# Altium PCB Conv_buck_R1.PcbDoc (part 2 of 2)
Units mm, origin at the board's own origin, x right, y up, seen from the top; angles counter-clockwise.
Board outline 115 x 110 mm, 2 copper layers (Top Layer, Bottom Layer), stack 1.62 mm thick; 149 components, 73 nets, 415 pads, 186 vias.
Unrouted connection lines stored in the file: 3.
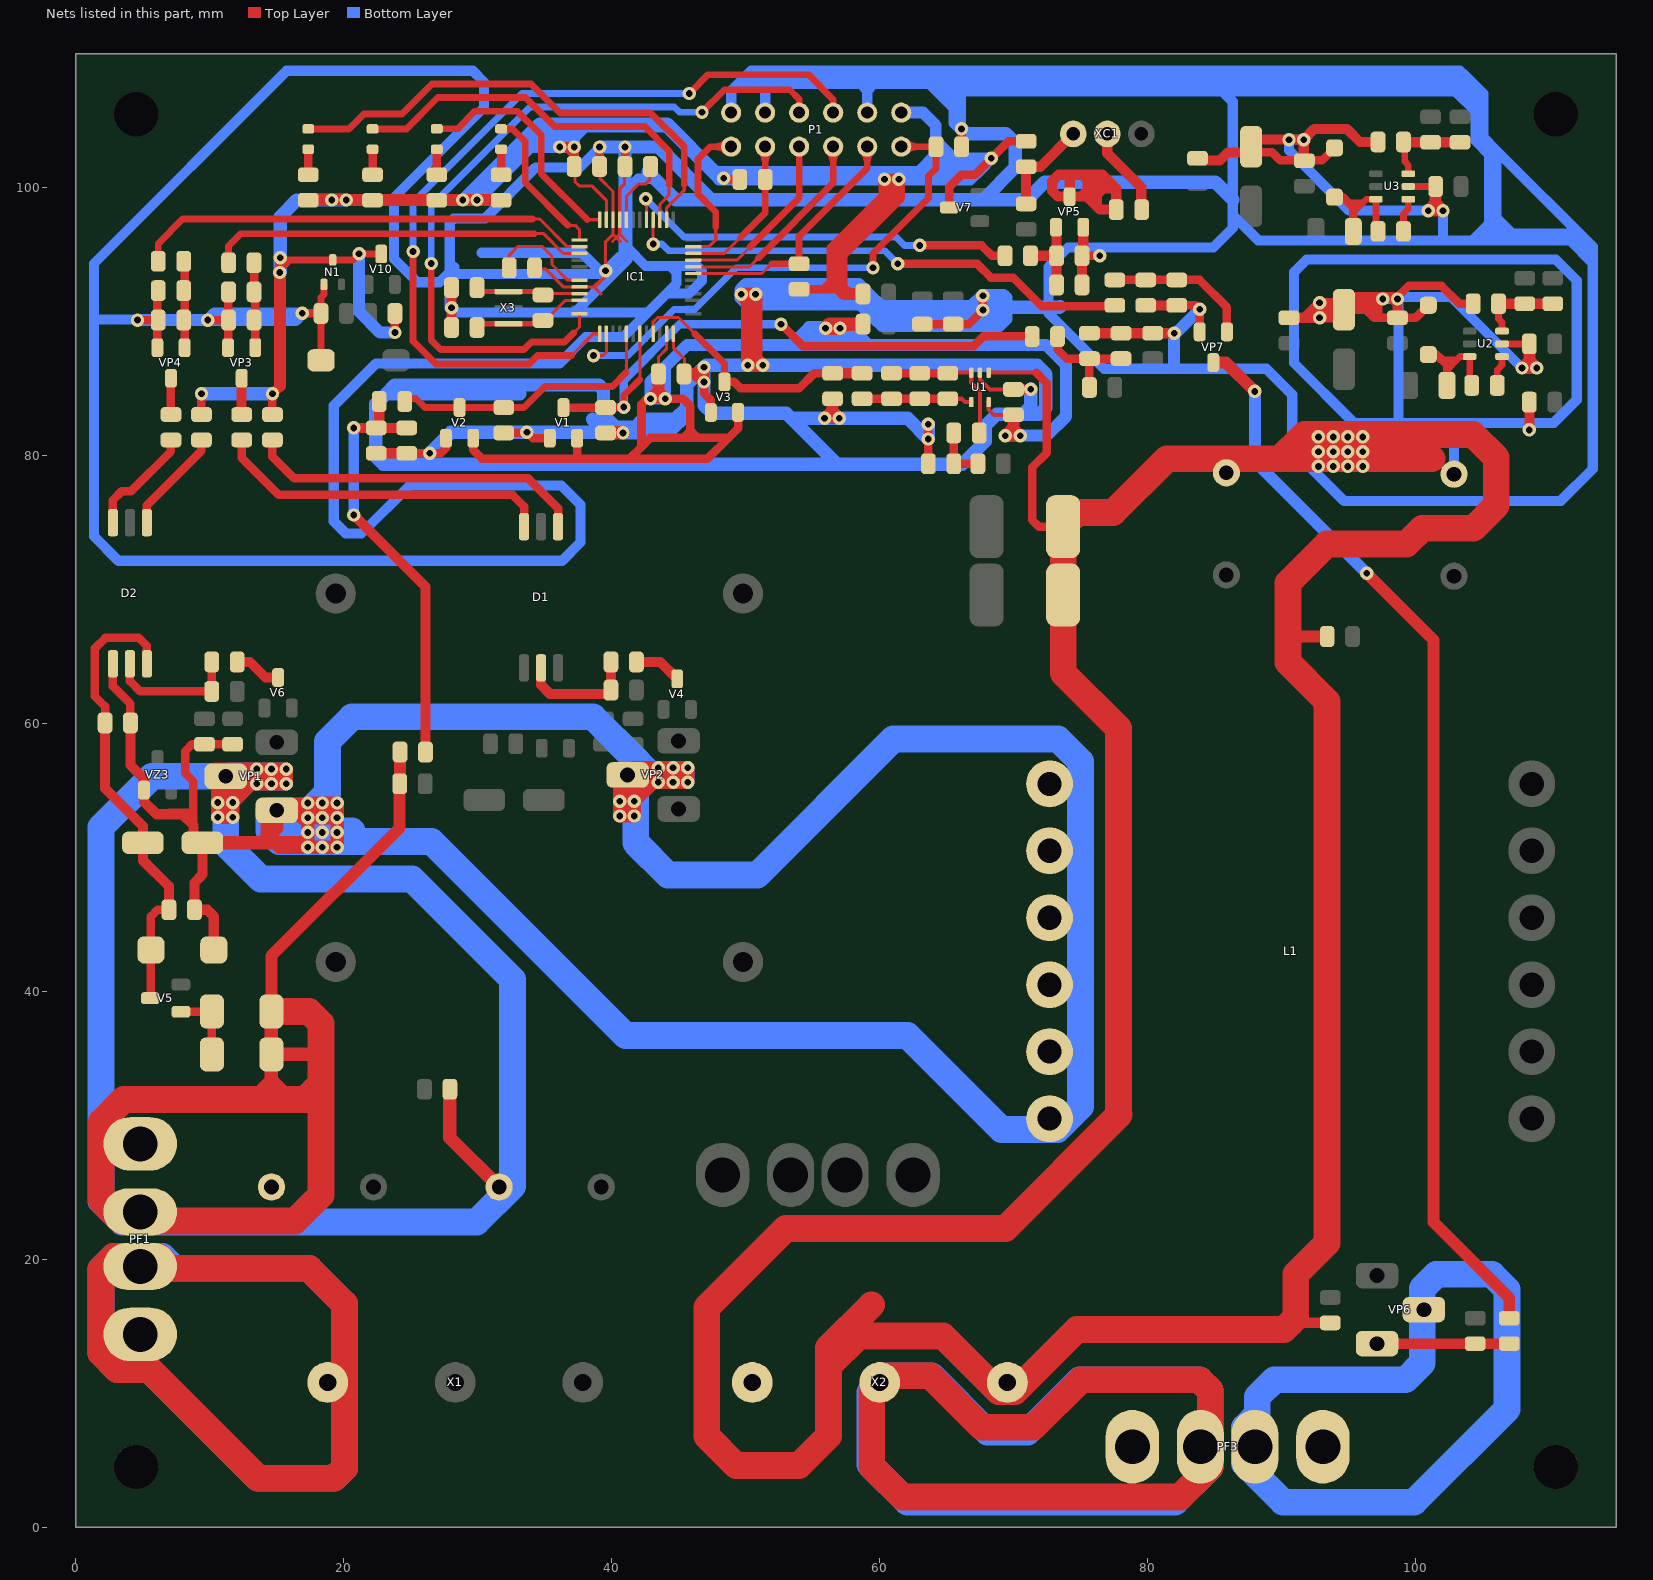
[diagram p2: the nets of this part, all layers, seen from the top]

## Via types
v1: diameter 1, hole 0.5, Top Layer to Bottom Layer, tented both sides, 186 vias

## Nets (pads, with @x,y where several pads share a name; then routed paths per layer and width w, separated by ;. In a path a pad name is that pad's centre, name@x,y a point inside that pad or via, vN(x,y) a via of type N, cw(c..) or ccw(c..) an arc to the next point about the centre after c; other vN are vias at no path point) (continued)
GND: C1.2 C2.2 C3.2 C4.2 C10.1 C11.1 C12.1 C14.1 C21.1 C22.1 C23.1 C25.1 C26.1 C27.2 C29.1 C30.1 C31.2 C33.1 C34.1 C35.1 C36.2 C37.2 C38.2 C39.2 C40.2 C41.2 C43.1 C44.1 C45.2 C46.1 C47.1 IC1.12 IC1.33 IC1.34 IC1.44 N1.GND P1.2 P1.4 P1.10 R1.2 R2.2 R3.2 R15.1 R24.1 R29.1 R33.1 R34.2 R37.2 R48.2 R52.1 R53.1 R56.1 R57.1 S1.1 U1.1 U1.2 U2.2 U3.2 V1.A V2.A V3.A V8.A V9.A VP3.S VP4.S VP5.S VP7.S X2.1 X2.3 | length 1616.4
  Top Layer w0.229: C43.1@33.9,93.925 35.075,93.925 36.396,92.604 IC1.44@37.605,92.604 38.677,92.604 ; C39.2@39.15,101.6 39.15,100.675 40.105,99.72 IC1.34@40.105,97.617 40.105,96.545 ; 39.222,92.059 38.677,92.604 ; 39.222,93.149 38.677,92.604 ; 39.56,96 40.105,96.545 ; 40.06,96 40.355,96.295 ; 40.605,96.505 40.605,96.545 ; 40.65,96 40.355,96.295 ; C38.2@40.95,101.6 40.95,100.275 40.605,99.93 IC1.33@40.605,97.617 40.605,96.545 ; 41.15,96 40.605,96.545 ; IC1.12@44.605,89.104 44.605,88.07 45.45,87.225 C36.2@45.45,86.1 ; 38.677,92.604 38.779,92.604 39.55,93.375 v1(39.55,93.8) 39.55,95.95 40.105,96.505 40.105,96.545 ; 40.105,96.545 40.355,96.295 ; 40.355,96.295 40.605,96.545
  Top Layer w0.305: U1.2@67.5,86.2 67.5,85.7 68.25,84.95 C12.1@69.9,84.95 ; U1.1@68.15,86.2 71.7,86.2
  Top Layer w0.508: S1.1@18.306,87.375 18.3,87.381 C37.2@18.3,90.625 18.3,91.825 18.515,92.04 N1.GND@18.515,92.786 ; U3.2@99.482,100.1 C35.1@101.525,100.1 ; U2.2@106.482,88.35 C34.1@108.525,88.35
  Top Layer w0.635: v1(4.6,90.125) C21.1@6.084,90.125 ; VP4.S@6.084,88.068 C21.1@6.084,90.125 ; R24.1@6.084,92.259 C21.1@6.084,90.125 ; C21.1@6.15,90.125 C21.1@6.084,90.125 ; v1(9.85,90.125) C14.1@11.359,90.125 ; VP3.S@11.359,88.068 C14.1@11.359,90.125 ; C14.1@11.4,90.125 C14.1@11.359,90.125 ; R15.1@11.425,92.525 11.359,92.459 C14.1@11.359,90.125 ; v1(16.9,90.625) C37.2@18.3,90.625 ; R56.1@24.7,80.175 v1(26.425,80.175) 27.225,80.175 27.634,80.584 V2.A@27.634,81.307 ; C47.1@31.95,81.7 33.725,81.7 34.118,81.307 V1.A@35.384,81.307 ; C39.2@39.1,101.6 v1(39.1,103.05) ; C38.2@41,101.6 v1(41,103.05) ; v1(46.9,85.5) 46.9,84.65 47.409,84.141 V3.A@47.409,83.232 ; C41.2@63.2,89.825 C40.2@65.5,89.825 66.675,89.825 v1(67.725,90.875) v1@67.725,91.8 ; C11.1@63.65,79.4 v1(63.65,81.25) v1(63.65,82.35) ; R48.2@66.125,103.075 v1(66.125,104.4) ; 71.7,86.2 72.5,85.4 72.5,80.225 71.4,79.125 71.4,75.2 71.9,74.7 R2.2@73.715,74.7 ; R29.1@75.125,94.925 v1(76.45,94.925) ; R33.1@82.2,91.225 83.625,91.225 v1(83.909,90.941) VP7.S@83.909,89.243 ; C31.2@87.675,102.645 89.33,102.645 89.925,102.05 91.675,102.05 93.042,102.05 V9.A@93.975,102.983 ; C27.2@94.675,90.895 96.33,90.895 96.925,90.3 ; C27.2@95.03,91.25 97.225,91.25 ; 96.925,91.075 96.925,90.3 ; R37.2@97.208,102.983 R37.2@97.325,103.1 ; v1@97.7,91.85 97.225,91.375 97.225,91.25 ; v1@98.675,91.85 99.5,92.675 101.975,92.675 103.3,91.35 R34.2@104.325,91.35 R34.2@104.208,91.233 ; V8.A@100.975,91.233 100.042,90.3 C25.1@98.675,90.3 97.5,90.3 ; 96.925,90.3 97.5,90.3 ; 97.225,91.25 97.225,90.575 97.5,90.3
  Top Layer w0.762: R57.1@22.425,80.175 R56.1@24.625,80.175 ; C45.2@28.05,89.85 v1(28.05,91.05) C44.1@28.05,92.25 ; C12.1@70,84.95 v1(71.3,84.95) ; C22.1@75.125,92.75 R29.1@75.125,94.925 75.216,95.016 VP5.S@75.216,97.057 ; R52.1@75.675,89.15 R53.1@78.038,89.15 R1.2@80.4,89.15 v1(82,89.15) ; C23.1@79.875,91.225 R33.1@82.2,91.225 ; C30.1@83.675,102.05 85.425,102.05 86.02,102.645 C31.2@87.675,102.645 ; C31.2@87.675,103.6 v1(90.575,103.6) v1(91.675,103.6) ; C26.1@90.575,90.3 91.75,90.3 ; C29.1@91.675,102.05 v1(91.675,103.6) ; C27.2@94.159,91.411 v1(92.861,91.411) ; C27.2@94.67,90.9 92.861,90.9 ; C27.2@94.675,90.895 94.091,90.311 v1(92.861,90.311) ; C27.2@94.675,91.85 v1@97.575,91.85 ; R37.2@97.225,103.425 95.875,103.425 94.9,104.4 92.475,104.4 v1(91.675,103.6) ; v1@97.7,91.85 98.15,91.85 ; C25.1@98.675,90.3 v1@98.675,91.325 ; C2.2@102.4,78.62 C2.2@102.9,78.62 ; v1(108.525,81.925) C33.1@108.525,84 ; 91.75,90.3 v1(92.861,91.411) ; 91.75,90.3 92.85,90.3 v1(92.861,90.311) ; v1(92.861,90.311) 92.861,90.9 ; 92.861,90.9 v1(92.861,91.411) ; 98.15,91.85 98.675,91.85 v1(98.675,91.7) v1@98.675,91.325 ; 98.15,91.85 v1@98.675,91.325
  Top Layer w0.8: 90.7,15.25 C4.2@93.65,15.25
  Top Layer w0.889: C36.2@45.45,86.1 46.3,86.1 ; C10.1@56.5,84.25 56.5,83.4 ; 90.575,66.5 C3.2@93.425,66.5 ; 101.475,98.8 v1(100.975,98.3) v1(102.075,98.3) 101.575,98.8 ; 101.525,98.9 C35.1@101.525,100.1 ; 108.475,87.05 v1(107.975,86.55) v1(109.075,86.55) 108.575,87.05 ; 108.525,87.15 C34.1@108.525,88.35 ; 46.3,86.1 v1(46.9,85.5) v1(46.9,86.6) 46.4,86.1 46.3,86.1 ; 56.5,83.4 v1(55.9,82.8) v1(57,82.8) 56.5,83.3 56.5,83.4
  Top Layer w1.016: C46.1@39.55,81.7 v1(40.85,81.7) ; v1(49.675,92.05) 50.175,91.55 v1(50.175,86.75) v1(51.275,86.75) 50.75,87.275 v1(50.75,92.05) v1(49.675,92.05)
  Top Layer w2: 59.4,16.6 56.2,13.4 56.2,12.025 ; 101.245,79.775 89.925,79.775 ; 56.2,12.025 58.45,14.275 64.75,14.275 68.9,10.125 70.125,10.125 74.75,14.75 90.2,14.75 90.7,15.25 91.075,15.625 91.075,18.875 91.806,19.606 93.425,21.225 93.425,61.65 90.5,64.575 90.5,70.5 93.4,73.4 99.35,73.4 100.525,74.575 104.35,74.575 106.05,76.275 106.05,79.85 104.325,81.575 91.725,81.575 89.925,79.775 ; 56.2,12.025 56.2,6.8 54,4.6 49.3,4.6 47.1,6.8 47.1,16.4 53,22.3 69.4,22.3 77.9,30.8 77.85,30.85 77.85,59.65 73.715,63.785 R3.2@73.715,69.6 R2.2@73.715,74.7 74.765,75.75 77.45,75.75 81.475,79.775 89.925,79.775
  Bottom Layer w0.635: v1(66.125,104.4) 66.125,107.156 66.175,107.206 ; v1(82,89.15) v1@82.118,89.15
  Bottom Layer w0.762: v1(4.6,90.125) 4.55,90.175 1.35,90.175 ; 28.275,94.075 27.15,92.95 25.504,92.95 23.75,94.704 23.75,99.275 30.475,106 30.475,107.9 29.635,108.74 15.74,108.74 1.35,94.35 1.35,90.175 ; 28.5,93.575 v1@39.35,93.575 ; 30.3,95.15 37.775,95.15 v1@39.35,93.575 ; v1(41,103.05) v1(39.1,103.05) 39.1,102.986 37.639,101.525 34.347,101.525 30.525,97.703 28.203,97.703 27.914,97.414 27.914,90.986 28.211,90.689 37.239,90.689 ; 44.525,99.4 43.25,100.675 43.229,100.675 41.975,100.675 41.161,99.861 41.161,95.536 ; P1.2@48.925,105.615 48.925,107.256 49.425,107.756 ; P1.4@51.465,105.615 51.465,107.256 ; P1.10@59.085,105.615 59.085,107.256 ; 64.075,107.85 103.175,107.85 ; 64.725,107.206 66.175,107.206 85.606,107.206 ; 65.55,105.934 63.729,107.756 59.585,107.756 ; 90.95,88.525 90.95,86.925 95.425,82.45 102.05,82.45 ; 90.95,88.7 90.95,93.7 91.9,94.65 110.5,94.65 112.064,93.086 112.064,84.164 110.35,82.45 103.75,82.45 ; v1(91.675,103.6) v1(90.575,103.6) 90.575,102.8 95.075,98.3 v1(100.975,98.3) v1(102.075,98.3) 102.075,96.075 ; v1(97.575,91.7) v1(98.675,91.7) v1@98.764,91.611 ; v1@98.675,91.85 102.675,91.85 v1(107.975,86.55) v1(109.075,86.55) ; 98.764,82.911 v1@98.764,91.611 ; v1@98.764,91.761 v1@98.764,91.611 ; C2.2@102.9,78.62 102.9,81.6 ; 1.35,90.175 1.35,73.975 3.175,72.15 36.3,72.15 37.675,73.525 37.675,76.35 36.25,77.775 24.914,77.775 21.325,74.186 20.175,74.186 20.161,74.2 20.15,74.2 19.25,75.1 19.25,83.725 22.4,86.875 36.086,86.875 38.075,88.864 40.864,88.864 42.689,90.689 ; 37.239,90.689 40.125,93.575 ; 37.239,90.689 42.689,90.689 ; v1@39.35,93.575 40.125,93.575 ; 40.125,93.575 41.161,94.611 41.161,95.536 ; 41.161,95.536 42.531,94.166 44.384,94.166 ; 42.689,90.689 44.113,92.113 ; 44.113,92.113 45.796,92.113 46.75,93.066 46.75,93.8 46.384,94.166 44.384,94.166 ; 44.113,92.113 44.85,92.85 44.85,93.7 44.384,94.166 ; 49.425,107.756 50.965,107.756 ; 49.425,107.756 50.07,108.4 ; 50.07,108.4 50.425,108.756 103.345,108.756 103.7,108.4 ; 50.07,108.4 102.625,108.4 ; 50.965,107.756 51.465,107.256 ; 50.965,107.756 51.965,107.756 ; 51.465,107.256 51.965,107.756 ; 51.965,107.756 58.585,107.756 ; 58.585,107.756 59.085,107.256 ; 58.585,107.756 59.585,107.756 ; 59.085,107.256 59.585,107.756 ; 85.606,107.206 102.995,107.206 104.5,105.7 104.5,103.5 105.525,102.475 105.525,97.325 ; 85.606,107.206 86.375,106.436 86.375,99.125 86.375,97.975 ; 86.375,97.975 88.275,96.075 102.075,96.075 ; 86.375,97.975 86.375,97 84.925,95.55 74.075,95.55 72.625,94.1 72.625,91.075 72.625,90.625 76.76,86.49 88.885,86.49 90.825,84.55 90.825,80.475 94.675,76.625 110.875,76.625 113.256,79.006 113.256,94.375 ; 102.05,82.45 102.9,81.6 ; 102.05,82.45 103.75,82.45 ; 102.075,96.075 104.275,96.075 ; 102.625,108.4 103.7,108.4 ; 102.625,108.4 103.175,107.85 ; 102.9,81.6 103.75,82.45 ; 103.175,107.85 105.075,105.95 ; 103.7,108.4 105.075,107.025 105.075,105.95 ; 104.275,96.075 105.525,97.325 ; 104.275,96.075 105.015,96.075 ; 105.015,96.075 105.64,96.7 ; 105.015,96.075 105.515,96.075 ; 105.075,105.95 105.075,103.775 106.075,102.775 ; 105.515,96.075 105.64,96.2 105.64,96.7 ; 105.515,96.075 111.556,96.075 113.256,94.375 ; 105.525,97.325 105.64,97.21 ; 105.64,96.7 105.64,97.21 ; 105.64,97.21 106.256,96.595 ; 106.075,102.775 106.075,97.781 106.256,97.6 ; 106.075,102.775 113.256,95.595 113.256,95.145 ; 106.256,96.595 106.256,97.6 ; 106.256,96.595 107.261,96.595 ; 106.256,97.6 107.261,96.595 ; 107.261,96.595 111.806,96.595 113.256,95.145 ; 113.256,94.375 113.256,95.145 ; v1(39.55,93.8) 39.975,93.8 41,94.825 40.575,94.825 v1(39.55,93.8)
  Bottom Layer w0.889: v1(4.6,90.125) v1(9.85,90.125) ; 82,86.85 v1(82,89.15) ; v1@82.118,89.15 v1(83.909,90.941) ; v1(9.85,90.125) 10.35,90.625 v1(16.9,90.625) 16.4,90.125 v1(9.85,90.125)
  Bottom Layer w1: 33.138,84.637 23.162,84.637 ; 38.575,82.725 38.925,82.375 40.028,82.375 ; v1@39.203,103.05 v1(41,103.05) ; 41,94.825 v1(41,103.05) ; 42.714,101.19 43.229,100.675 44.78,99.125 47.451,99.125 ; 45.6,83.075 45.6,83.575 44.767,82.742 ; 45.6,83.717 45.6,85.3 v1(46.9,86.6) ; v1(63.65,82.35) v1(63.65,81.25) 62.1,82.8 v1(57,82.8) v1(55.9,82.8) 53.425,82.8 ; 65.65,106.9 65.65,105.282 65.653,105.279 65.653,104.873 v1(66.125,104.4) 66.475,104.05 69.45,104.05 70.15,103.35 70.15,101.525 67.75,99.125 ; v1(71.3,84.95) 71.3,83.7 70.7,83.1 ; 86.375,99.125 85.086,100.414 72.325,100.414 71.036,99.125 67.75,99.125 ; 23.162,84.637 23.8,85.275 39.025,85.275 39.397,84.903 39.397,83.006 40.028,82.375 ; 23.162,84.637 22.4,83.875 22.4,79.925 22.95,79.375 56.85,79.375 ; 40.028,82.375 40.281,82.122 ; 40.281,82.122 41.75,82.122 ; 40.281,82.122 40.653,81.75 40.703,81.7 v1(40.85,81.7) 44.225,81.7 44.647,82.122 ; v1(41,103.05) 43.525,103.05 47.451,99.125 ; 41.75,82.122 42.37,82.742 44.767,82.742 ; 41.75,82.122 44.647,82.122 ; 44.647,82.122 45.267,82.742 44.767,82.742 ; v1(46.9,86.6) v1(46.9,85.5) 46.9,83.775 47.5,83.175 53.05,83.175 53.425,82.8 ; v1(46.9,86.6) 47.05,86.75 v1(50.175,86.75) v1(51.275,86.75) 71.775,86.75 72.423,86.103 72.423,83.575 71.948,83.1 70.7,83.1 ; 47.451,99.125 67.75,99.125 ; 53.425,82.8 56.85,79.375 ; 56.85,79.375 66.175,79.375 67.892,81.092 67.892,82.242 68.75,83.1 70.7,83.1
  Bottom Layer w1.016: v1(26.425,80.175) 28,81.75 v1(33.675,81.75) 40.653,81.75 40.8,81.75 v1(40.85,81.7) ; 50.043,92.768 49.675,92.4 49.675,91.8 50.134,91.341 54.284,91.341 ; v1@67.65,91.134 66.909,91.134 ; 69.125,90.875 v1(67.725,90.875) ; 73.475,91.125 73.425,91.075 72.625,91.075 69.425,91.075 ; 53.575,92.05 54.284,91.341 ; 53.575,92.05 v1(50.75,92.05) v1(49.675,92.05) 49.675,92.368 50.075,92.768 58.433,92.768 59.15,92.05 ; 53.575,92.05 59.15,92.05 ; 54.284,91.341 58.593,91.341 58.8,91.134 ; 58.8,91.134 60.066,91.134 ; 58.8,91.134 59.742,90.192 ; 59.15,92.05 60.066,91.134 ; 59.742,90.192 67.042,90.192 ; 59.742,90.192 60.199,89.736 66.586,89.736 ; 60.066,91.134 66.909,91.134 ; 66.586,89.736 67.042,90.192 ; 66.586,89.736 68.936,89.736 69.425,90.225 ; 66.909,91.134 v1(67.725,91.95) ; 67.042,90.192 67.075,90.225 ; 67.075,90.225 69.425,90.225 ; 67.075,90.225 v1(67.725,90.875) ; v1(67.725,90.875) v1(67.725,91.95) ; v1(67.725,91.95) 69.25,91.95 69.425,91.775 ; v1(67.725,91.95) 67.9,91.775 69.425,91.775 ; 69.425,90.225 69.425,91.075 ; 69.425,91.075 69.425,91.775
  other v1: 92.775,79.2 93.875,79.2 94.975,79.2 96.075,79.2 92.775,80.3 93.875,80.3 94.975,80.3 96.075,80.3 92.775,81.4 93.875,81.4 94.975,81.4 96.075,81.4
GPIO34: IC1.19 P1.9 R46.1 | length 20.9
  Top Layer w0.229: IC1.19@46.105,93.604 51.229,93.604 51.963,94.338
  Top Layer w0.508: 51.963,94.338 53.988,94.338 R46.1@54,94.325 54,96.375 59.085,101.46 P1.9@59.085,103.075 ; P1.9@58.734,102.724 cw(c57.888,101.878) 59.085,101.878 cw(c60.282,101.878) P1.9@59.436,102.724
HOT_SPOT: C17.2 C18.2 C19.1 C20.1 D2.4 L1.1 R22.1 VP1.S VP2.D VZ2.A VZ3.A | length 313.1
  Top Layer w0.635: D2.4@2.76,64.459 2.76,62.79 4.075,61.475 C19.1@4.075,60.05 ; 6.975,53.325 8.577,53.325 8.777,53.525 ; 8.777,52.398 8.777,53.525 ; R22.1@11.7,58.45 C20.1@9.6,58.45 8.675,58.45 8.175,57.95 8.175,56.275 8.777,55.673 8.777,53.525
  Top Layer w0.762: C19.1@4.075,60.05 4.075,56.9 5.084,55.891 VZ3.A@5.084,55.032 5.084,54.166 6.025,53.225 7.95,53.225 8.777,52.398 8.777,51.768 C17.2@9.445,51.1 9.445,48.72 8.85,48.125 C18.2@8.85,46.1 9.8,46.1 10.299,45.601 VZ2.A@10.299,43.1
  Top Layer w1: VP1.S@15,53.52 15.43,53.95 17.18,53.95 v1(17.3,54.07) ; v1@16.9,52.97 v1(17.3,52.97) ; v1(17.3,50.77) v1(17.3,51.87) v1(17.3,52.97) ; VP2.D@40.6,55.57 v1(40.6,54.2) v1(40.6,53.1) v1(41.7,53.1) ; VP2.D@41.7,55.65 v1(41.7,54.2) ; VP2.D@41.74,55.61 v1(43.49,55.61) ; VP2.D@41.74,56.71 v1(43.49,56.71) ; v1@43.1,55.6 v1(41.7,54.2) ; v1(17.3,52.97) v1(18.4,52.97) v1(19.5,52.97) 19.5,53.52 ; v1(17.3,52.97) 17.3,53.52 ; v1(17.3,52.97) 17.85,53.52 ; 17.3,53.52 v1(17.3,54.07) ; 17.3,53.52 17.85,53.52 ; v1(17.3,54.07) v1(18.4,54.07) ; 17.85,53.52 v1(18.4,54.07) ; 17.85,53.52 19.5,53.52 ; v1(18.4,54.07) v1(19.5,54.07) 19.5,53.52 ; v1(41.7,53.1) v1(41.7,54.2) ; v1(41.7,53.1) 41.19,53.61 VP2.D@41.19,56.16 43.49,56.16 ; v1(43.49,55.61) v1(44.59,55.61) v1(45.69,55.61) 45.69,56.16 ; v1(43.49,55.61) 43.49,56.16 ; v1(43.49,55.61) 44.04,56.16 ; 43.49,56.16 v1(43.49,56.71) ; 43.49,56.16 44.04,56.16 ; v1(43.49,56.71) v1(44.59,56.71) ; 44.04,56.16 45.69,56.16 ; 44.04,56.16 v1(44.59,56.71) ; v1(44.59,56.71) v1(45.69,56.71) 45.69,56.16
  Top Layer w1.016: C17.2@9.445,51.1 13.9,51.1 ; v1@16.97,51.1 14.9,51.1 ; v1(19.5,52.97) v1(19.5,51.87) v1(19.5,50.77) v1(18.4,50.77) v1(17.3,50.77) 15.23,50.77 14.9,51.1 ; 13.9,51.1 14.4,51.6 ; 13.9,51.1 14.9,51.1 ; 14.4,51.6 15,52.2 VP1.S@15,53.52 14.3,52.82 14.3,51.7 14.4,51.6 ; 14.4,51.6 14.9,51.1
  Bottom Layer w1: v1@16.9,52.97 v1(17.3,52.97) 17.825,52.97 v1(18.4,52.97) ; v1(17.3,54.07) 17.995,54.07 v1(18.4,54.07) v1(19.5,54.07) ; VP2.D@41.19,56.16 41.8,56.16 42.94,56.16 45.14,56.16 ; VP2.D@41.74,55.61 41.8,55.61 v1@43.01,55.61 ; VP2.D@41.74,56.71 41.8,56.71 42.39,56.71 v1(43.49,56.71) v1(44.59,56.71) v1(45.69,56.71) ; v1@41.8,54.4 v1@43.01,55.61 ; v1(18.4,52.97) v1(19.5,52.97) 19.5,53.52 ; v1(18.4,52.97) 18.95,53.52 ; 18.95,53.52 v1(19.5,54.07) ; 18.95,53.52 19.5,53.52 ; 19.5,53.52 v1(19.5,54.07) ; v1@43.01,55.61 v1(43.49,55.61) v1(44.59,55.61) ; v1(44.59,55.61) 45.14,56.16 ; v1(44.59,55.61) v1(45.69,55.61) 45.69,56.16 ; 45.14,56.16 v1(45.69,56.71) ; 45.14,56.16 45.69,56.16 ; 45.69,56.16 v1(45.69,56.71)
  Bottom Layer w1.9: VP1.S@15,53.52 17.445,53.52 17.825,53.52 18.95,53.52
  Bottom Layer w2: VP1.S@15,53.492 14.4,53.492 14.4,51.975 ; 17.445,53.52 17.995,54.07 18.775,54.85 ; 17.825,52.97 17.825,53.52 ; 18.775,54.749 18.775,54.85 ; 20.625,51.975 14.4,51.975 ; VP2.D@41.17,56.14 VP2.D@41.19,56.16 ; 42.94,56.16 42.39,56.71 41.8,57.3 ; 14.4,51.975 15.175,51.2 26.55,51.2 41.05,36.7 62.1,36.7 69.1,29.7 73.3,29.7 75,31.4 75,57.175 73.325,58.85 61.03,58.85 50.88,48.7 44.2,48.7 41.8,51.1 41.8,54.4 41.8,55.61 41.8,56.16 41.8,56.71 41.8,57.3 ; 18.775,54.85 18.775,58.65 20.625,60.5 38.6,60.5 41.8,57.3
  other v1: 18.4,51.87
IN-: C9.1 R4.1 R5.1 R7.2 U1.3 | length 10.2
  Top Layer w0.305: C9.1@65.15,86.2 U1.3@66.85,86.2 66.85,85.45 67.5,84.8 R7.2@67.5,81.75
  Top Layer w0.635: R5.1@61.3,86.15 C9.1@65.1,86.15
IO: C10.2 IC1.9 R8.2 V3.AK | length 20.1
  Top Layer w0.229: IC1.9@43.105,89.104 43.105,90.005 43.425,90.325 45,90.325 46.225,89.1
  Top Layer w0.508: 46.225,89.1 48.425,86.9 V3.AK@48.425,85.518
  Top Layer w0.635: V3.AK@48.425,85.518 49.132,85.518 49.6,85.05 54.025,85.05 55.125,86.15 C10.2@56.5,86.15
  Top Layer w0.762: C10.2@56.5,86.15 R8.2@58.7,86.15
LED_BAT: H3.K IC1.26 | length 37.4
  Top Layer w0.229: IC1.26@44.105,97.617 44.105,98.505 45.425,99.825 45.425,100.225
  Top Layer w0.508: H3.K@17.35,104.4 20.376,104.4 21.494,105.518 24.356,105.518 26.595,107.757 33.993,107.757 36.159,105.591 42.909,105.591 45.425,103.075 45.425,100.225
LED_FAULT: H1.K IC1.37 | length 11.5
  Top Layer w0.229: 36.75,97.2 37.275,97.2 37.605,96.87 IC1.37@37.605,96.104
  Top Layer w0.508: H1.K@31.749,104.4 32.6,104.4 33.55,103.45 33.55,100.4 36.75,97.2
LED_OUT: H4.K IC1.36 | length 17.7
  Top Layer w0.229: 38.184,97.617 IC1.36@39.105,97.617
  Top Layer w0.508: H4.K@26.95,104.408 28.483,104.408 29.8,105.725 32.95,105.725 34.75,103.925 34.75,101.05 38.184,97.617
LED_PV: H2.K IC1.27 | length 30.2
  Top Layer w0.229: IC1.27@43.605,97.617 43.605,98.78 44.3,99.475 44.3,100.225
  Top Layer w0.508: H2.K@22.15,104.4 24.675,104.4 27.016,106.741 33.572,106.741 35.738,104.575 42.488,104.575 44.3,102.763 44.3,100.225
NetC11_2: C11.2 R6.2 R7.1 | length 4.1
  Top Layer w0.635: R7.1@65.55,81.7 C11.2@65.55,79.4 R6.2@67.35,79.4
NetC14_2: C14.2 R14.2 R15.2 VP3.G | length 6.6
  Top Layer w0.635: R15.2@13.325,92.525 R14.2@13.325,94.725 ; VP3.G@13.391,88.068 R15.2@13.391,92.459
NetC21_2: C21.2 R23.2 R24.2 VP4.G | length 6.5
  Top Layer w0.635: R23.2@8.05,94.525 8.116,94.459 VP4.G@8.116,88.068
NetC22_2: C22.2 R28.2 R29.2 VP5.G | length 6.1
  Top Layer w0.762: R28.2@71.275,94.925 R29.2@73.225,94.925 ; C22.2@73.225,92.75 R29.2@73.225,94.925 ; VP5.G@73.225,96.941 R29.2@73.225,94.925
NetC23_2: C23.2 R32.2 R33.2 VP7.G | length 10.5
  Top Layer w0.635: R32.2@77.575,93.125 R33.2@82.2,93.125 ; R33.2@82.775,93.125 83.9,93.125 85.941,91.084 VP7.G@85.941,89.243
NetC24_1: C24.1 U2.1 | length 2.3
  Top Layer w0.508: C24.1@106.125,85.25 106.125,86.4 106.482,86.756 U2.1@106.482,87.397
NetC24_2: C24.2 L2.1 U2.6 V8.K | length 9.1
  Top Layer w0.508: 101.988,87.162 102.014,87.136 103.089,87.136 ; 102.403,86.45 103.089,87.136 ; C24.2@104.225,85.25 104.069,85.407 U2.6@104.069,87.397 103.35,87.397 103.089,87.136
  Top Layer w0.635: V8.K@100.975,87.55 101.6,87.55 101.988,87.162 ; 102.014,87.136 102.375,86.775 L2.1@102.375,85.525 ; L2.1@102.375,85.25 L2.1@102.375,86.025
NetC28_1: C28.1 U3.1 | length 2.5
  Top Layer w0.508: C28.1@99.125,96.75 99.125,98.05 99.482,98.407 U3.1@99.482,99.148
NetC28_2: C28.2 L3.1 U3.6 V9.K | length 9.1
  Top Layer w0.508: 94.988,98.913 95.014,98.886 96.089,98.886 ; 95.403,98.2 96.089,98.886 ; C28.2@97.225,97 97.069,97.157 U3.6@97.069,99.148 96.35,99.148 96.089,98.886
  Top Layer w0.635: V9.K@93.975,99.3 94.6,99.3 94.988,98.913 ; 95.014,98.886 95.375,98.525 L3.1@95.375,97.275 ; L3.1@95.375,97 95.375,97.775
NetC44_2: C44.2 IC1.45 R49.1 X3.1 | length 7.7
  Top Layer w0.229: R49.1@34.7,92.25 R49.1@34.9,92.05 ; R49.1@34.954,92.104 IC1.45@37.605,92.104
  Top Layer w0.381: C44.2@29.95,92.25 X3.1@32.3,92.25 R49.1@34.7,92.25
NetC45_1: C45.1 IC1.46 R49.2 X3.2 | length 8.1
  Top Layer w0.229: R49.2@35.25,90.15 35.25,90.3 36.554,91.604 IC1.46@37.605,91.604
  Top Layer w0.381: C45.1@29.95,89.85 X3.2@32.3,89.85 34.6,89.85 R49.2@34.9,90.15
NetD1_1: D1.1 R10.2 | length 25.5
  Top Layer w0.635: R10.2@14.675,81.175 14.675,79.925 16.3,78.3 33.775,78.3 36,76.075 D1.1@36,74.7
NetD1_3: D1.3 R12.2 | length 25.4
  Top Layer w0.635: R12.2@12.375,81.175 12.375,79.85 15.15,77.075 32.6,77.075 33.46,76.215 D1.3@33.46,74.7
NetD1_5: D1.5 R9.1 R11.1 | length 9
  Top Layer w0.762: D1.5@34.73,64.159 34.73,62.886 35.416,62.2 39.65,62.2 R11.1@39.95,62.5 R9.1@39.95,64.6
NetD2_1: D2.1 R19.2 | length 7.9
  Top Layer w0.635: D2.1@5.3,75 5.3,76.3 9.375,80.375 R19.2@9.375,81.175
NetD2_3: D2.3 R21.2 | length 9.1
  Top Layer w0.635: D2.3@2.824,75.699 2.76,75.635 D2.3@2.76,75 2.76,76.685 3.425,77.35 4.125,77.35 7.1,80.325 R21.2@7.1,81.175
NetD2_5: D2.5 R18.1 R20.1 | length 9.9
  Top Layer w0.635: D2.5@4.03,64.459 4.03,63.17 4.8,62.4 7.7,62.4 R20.1@10.15,62.4 R18.1@10.15,64.6
NetH1_A: H1.A R40.1 | length 1.8
  Top Layer w0.635: R40.1@31.749,101.125 H1.A@31.749,102.876
NetH2_A: H2.A R41.1 | length 1.8
  Top Layer w0.635: H2.A@22.15,102.876 22.15,101.126 R41.1@22.151,101.124
NetH3_A: H3.A R42.1 | length 1.8
  Top Layer w0.635: H3.A@17.35,102.876 17.35,101.126 R42.1@17.352,101.124
NetH4_A: H4.A R43.1 | length 1.8
  Top Layer w0.635: H4.A@26.95,102.884 26.95,101.133 R43.1@26.951,101.132
NetR9_2: R9.2 V4.K | length 3.6
  Top Layer w0.762: R9.2@41.85,64.6 43.643,64.6 V4.K@44.9,63.343
NetR12_1: R12.1 VP3.D | length 2.7
  Top Layer w0.762: R12.1@12.375,83.075 VP3.D@12.375,85.782
NetR16_2: R16.2 R17.2 V5.A | length 5.5
  Top Layer w0.635: V5.A@7.843,38.484 R16.2@10.139,38.484 ; R17.2@10.155,35.3 R16.2@10.155,38.5
NetR18_2: R18.2 V6.K | length 3.5
  Top Layer w0.762: R18.2@12.05,64.6 13,64.6 14.157,63.443 V6.K@15.1,63.443
NetR21_1: R21.1 VP4.D | length 2.7
  Top Layer w0.635: R21.1@7.1,83.075 VP4.D@7.1,85.782
NetR25_1: R25.1 R27.1 XC1.3 | length 7.3
  Top Layer w0.762: R27.1@70.95,98.8 R25.1@70.95,101.575 72.02,101.575 XC1.3@74.47,104.025
NetR26_1: R26.1 VP5.D | length 23.6
  Top Layer w0.762: VP5.D@74.2,99.343 73.332,99.343 72.9,99.775 72.9,100.5 73.375,100.975 74.225,100.975 ; VP5.D@74.2,99.343 74.2,100.95 74.225,100.975 ; VP5.D@74.2,99.343 75.075,99.343 ; 74.225,100.975 75.15,100.975 ; 75.075,99.343 75.507,99.343 ; 75.075,99.343 75.507,99.775 ; 75.15,100.975 75.55,100.575 75.55,99.875 ; 75.15,100.975 76.65,100.975 ; 75.507,99.343 76.225,98.625 ; 75.507,99.343 75.507,99.775 ; 75.507,99.343 76.114,99.95 76.7,99.95 ; 75.507,99.775 75.507,99.832 75.55,99.875 ; 75.507,99.775 75.55,99.818 75.55,99.875 ; 75.55,99.875 76.175,100.5 ; 76.175,100.5 76.875,100.5 77,100.625 ; 76.175,100.5 76.65,100.975 ; 76.225,98.625 76.475,98.375 R26.1@77.675,98.375 77.675,99.95 ; 76.225,98.625 76.225,99.475 76.7,99.95 ; 76.65,100.975 77,100.625 ; 76.7,99.95 77.675,99.95 ; 77,100.625 77.675,99.95
NetR26_2: R26.2 XC1.2 | length 6
  Top Layer w0.762: XC1.2@77.01,104.025 77.01,102.59 79.55,100.05 R26.2@79.55,99.125
NetR30_1: R30.1 R31.2 VP6.G | length 9.9
  Top Layer w0.8: VP6.G@97.15,13.7 R30.1@104.475,13.7 R31.2@107.025,13.7
NetR31_1: R31.1 VP7.D | length 81.1
  Top Layer w0.889: VP7.D@84.925,86.957 85.868,86.957 v1(88.025,84.8) ; v1(96.375,71.225) 101.375,66.225 101.375,22.775 107.025,17.125 R31.1@107.025,15.6
  Bottom Layer w0.889: v1(88.025,84.8) 88.025,79.575 v1(96.375,71.225)
NetR34_1: R34.1 R35.1 R36.1 U2.3 | length 6.2
  Top Layer w0.508: R34.1@106.225,91.35 106.225,90.2 106.482,89.944 U2.3@106.482,89.302
  Top Layer w0.762: R34.1@106.225,91.35 R35.1@108.175,91.35 R36.1@110.275,91.35
NetR37_1: R37.1 R38.1 R39.1 U3.3 | length 6.4
  Top Layer w0.508: R37.1@99.225,103.1 99.225,101.95 99.482,101.694 U3.3@99.482,101.053
  Top Layer w0.762: R37.1@99.125,103.425 99.15,103.4 R38.1@101.15,103.4 R39.1@103.35,103.4
NetR50_1: R50.1 R51.2 R52.2 R53.2 | length 8.1
  Top Layer w0.635: R51.2@73.3,88.9 73.3,87.925 73.975,87.25 R52.2@75.675,87.25 ; R50.1@75.675,85.1 R52.2@75.675,87.25 ; R53.2@78.038,87.25 R52.2@75.675,87.25
NetR54_1: R54.1 R55.2 R56.2 R57.2 | length 32.6
  Top Layer w0.762: v1(20.75,75.575) 26.1,70.225 R54.1@26.1,57.875 ; v1(20.75,82.075) R57.2@22.425,82.075 ; R55.2@22.65,84.275 22.65,82.3 R57.2@22.425,82.075 ; R56.2@24.625,82.075 R57.2@22.425,82.075
  Bottom Layer w0.762: v1(20.75,75.575) v1(20.75,82.075)
OUT: C9.2 R4.2 R5.2 R8.1 U1.4 | length 7.9
  Top Layer w0.305: C9.2@65.1,84.25 66.15,84.25 66.4,84 U1.4@66.85,84
  Top Layer w0.635: R8.1@58.7,84.25 R5.2@60.9,84.25 ; R5.2@61.3,84.25 C9.2@65.1,84.25
OUTPUT: PF3.1 PF3.2 VP6.D X2.2 | length 199.6
  Top Layer w2: X2.2@60.025,10.8 59.425,10.2 59.425,4.539 61.714,2.25 82.45,2.25 84.7,4.5 84.7,10.2 83.9,11 75.025,11 71.475,7.45 67.65,7.45 63.8,11.3 X2.2@60.1,11.3
  Bottom Layer w2: X2.2@60.025,10.8 59.275,10.05 59.275,4.689 62.1,1.864 82.064,1.864 84.7,4.5 84.7,10.2 83.9,11 74.95,11 71.05,7.1 68.075,7.1 63.875,11.3 X2.2@60.1,11.3 ; PF3.1@87.25,4.75 87.25,7.45 88.2,8.4 88.2,9.725 89.475,11 99.275,11 100.525,12.25 100.525,17.825 101.575,18.875 105.725,18.875 106.85,17.75 106.85,8.8 99.914,1.864 90.136,1.864 PF3.1@87.25,4.75
PV_+: C5.1 C6.1 C7.1 C8.1 PF1.1 PF1.2 R16.1 R17.1 R54.2 VP1.D X1.1 | length 388.5
  Top Layer w0.889: R16.1@14.6,38.5 14.6,42.65 24.175,52.225 C7.1@24.175,55.5 ; C7.1@24.2,55.525 R54.2@24.2,57.875
  Top Layer w1: VP1.D@10.4,56.6 v1(13.5,56.6) ; VP1.D@10.6,55.47 v1(10.6,54.1) v1(10.6,53) v1(11.7,53) ; VP1.D@11.19,56.06 11.19,53.51 v1(11.7,53) ; VP1.D@11.2,56.05 13.5,56.05 ; VP1.D@11.7,55.55 v1(11.7,54.1) ; 13.175,31.925 14.6,33.35 ; 14.6,31.925 14.6,33.35 ; R16.1@14.6,38.5 R17.1@14.6,35.3 ; 16.025,31.925 14.6,33.35 ; 18.2,35.3 R17.1@14.6,35.3 ; C7.1@24.175,55.5 C7.1@24.2,55.525 ; C8.1@27.925,32.7 27.925,30.325 27.925,29.075 C6.1@31.6,25.4 ; v1(11.7,53) v1(11.7,54.1) ; v1(11.7,54.1) 13.1,55.5 v1(13.5,55.5) ; v1(13.5,55.5) 13.5,56.05 ; v1(13.5,55.5) v1(14.6,55.5) v1(15.7,55.5) 15.7,56.05 ; v1(13.5,55.5) 14.05,56.05 ; 13.5,56.05 v1(13.5,56.6) ; 13.5,56.05 14.05,56.05 ; v1(13.5,56.6) v1(14.6,56.6) ; 14.05,56.05 15.7,56.05 ; 14.05,56.05 v1(14.6,56.6) ; 14.6,33.35 R17.1@14.6,35.3 ; v1(14.6,56.6) v1(15.7,56.6) 15.7,56.05
  Top Layer w2: R16.1@15.05,38.5 17.4,38.5 18.3,37.6 18.3,33.125 ; 18.3,33.125 17.1,31.925 16.025,31.925 14.6,31.925 13.175,31.925 3.575,31.925 1.9,30.25 1.9,24.364 3.414,22.85 16.35,22.85 18.3,24.8 18.3,33.125 ; 1.864,13 3.089,11.775 5.475,11.775 13.6,3.65 19.275,3.65 20.05,4.425 20.05,16.675 17.4,19.325 7.025,19.325 6.15,20.2 2.8,20.2 1.864,19.264 1.864,13
  Bottom Layer w1: v1(10.6,53) 11.19,53.59 13.1,55.5 v1(13.5,55.5) v1(14.6,55.5) ; VP1.D@11.2,56.05 15.15,56.05 ; VP1.D@11.4,56.6 v1(13.5,56.6) v1(14.6,56.6) v1(15.7,56.6) ; v1(14.6,55.5) 15.15,56.05 ; v1(14.6,55.5) v1(15.7,55.5) 15.7,56.05 ; 15.15,56.05 v1(15.7,56.6) ; 15.15,56.05 15.7,56.05 ; 15.7,56.05 v1(15.7,56.6)
  Bottom Layer w2: 1.864,13 1.864,19.264 2.8,20.2 6.475,20.2 7.35,19.325 17.4,19.325 20.05,16.675 20.05,4.425 19.275,3.65 13.6,3.65 5.475,11.775 3.089,11.775 1.864,13 ; 1.864,24.35 3.439,22.775 29.925,22.775 32.6,25.45 32.6,40.9 25.1,48.4 13.8,48.4 11.19,51.01 11.19,53.59 VP1.D@11.19,56.06 5.66,56.06 1.864,52.264 1.864,24.35
PWM1A: IC1.29 R28.1 | length 30.2
  Top Layer w0.229: v1(42.55,99.175) 42.605,99.12 IC1.29@42.605,97.617
  Top Layer w0.635: v1(63,95.7) 67.626,95.7 68.4,94.925 R28.1@69.375,94.925
  Bottom Layer w0.508: v1(42.55,99.175) 45.4,96.325 61.25,96.325 61.876,95.7 v1(63,95.7)
PWM1B: IC1.28 R32.1 | length 38.3
  Top Layer w0.229: v1@43.105,95.805 IC1.28@43.105,97.617
  Top Layer w0.635: v1(61.375,94.325) 67.3,94.325 68.325,93.3 69.975,93.3 72.126,91.15 77.575,91.15 R32.1@77.575,91.225
  Bottom Layer w0.508: v1(43.1,95.8) 43.763,95.8 44.254,95.309 60.391,95.309 v1(61.375,94.325)
PWM2B: IC1.38 R23.1 | length 34.4
  Top Layer w0.229: 34.1,97.675 34.625,97.675 36.696,95.604 IC1.38@37.605,95.604
  Top Layer w0.508: R23.1@6.15,94.525 6.15,95.85 7.975,97.675 34.1,97.675
PWM3A: IC1.39 R14.1 | length 28.4
  Top Layer w0.229: 34.2,96.575 34.925,96.575 36.396,95.104 IC1.39@37.605,95.104
  Top Layer w0.508: R14.1@11.4,94.4 11.4,95.65 12.325,96.575 34.2,96.575
SCI_RX: IC1.48 P1.6 | length 55.8
  Top Layer w0.229: 37.15,89.15 37.605,89.605 IC1.48@37.605,90.604
  Top Layer w0.508: v1(26.525,94.35) 26.525,88.637 27.237,87.925 33.464,87.925 34.031,88.491 36.491,88.491 37.15,89.15 ; v1(46.75,105.65) 48.425,107.325 53.3,107.325 54.005,106.62 P1.6@54.005,105.615
  Bottom Layer w0.508: v1(26.525,94.35) 26.525,98.65 33.907,106.032 44.675,106.032 45.056,105.65 v1(46.75,105.65)
SCI_TX: IC1.1 P1.8 | length 62.5
  Top Layer w0.229: 37,87.475 38.629,89.104 IC1.1@39.105,89.104
  Top Layer w0.508: v1(25.175,95.25) 25.175,88.55 26.875,86.85 33.826,86.85 34.451,87.475 37,87.475 ; v1(45.8,107.048) 47.203,108.45 54.7,108.45 56.545,106.605 P1.8@56.545,106.115
  Bottom Layer w0.508: v1(25.175,95.25) 25.175,98.9 33.323,107.048 33.687,107.048 v1(45.8,107.048)
TCK: IC1.23 P1.1 | length 13.2
  Top Layer w0.229: IC1.23@46.105,95.604 47.254,95.604 47.775,96.125 47.775,97.075
  Top Layer w0.508: 47.775,97.075 47.775,98.2 46.441,99.534 46.441,102.15 47.366,103.075 P1.1@48.925,103.075 ; P1.1@48.574,102.724 ccw(c47.728,101.878) 47.728,103.075 ccw(c47.728,104.272) P1.1@48.574,103.426
TDI: IC1.20 P1.7 | length 17.6
  Top Layer w0.229: IC1.20@46.105,94.104 50.292,94.104 50.963,94.775
  Top Layer w0.508: 50.963,94.775 56.545,100.357 P1.7@56.545,103.075 ; P1.7@56.194,102.724 cw(c55.348,101.878) 56.545,101.878 cw(c57.742,101.878) P1.7@56.896,102.724
TDO: IC1.22 P1.3 R47.1 | length 13.4
  Top Layer w0.229: IC1.22@46.105,95.104 48.418,95.104 49.657,96.343
  Top Layer w0.508: 49.657,96.343 51.475,98.161 R47.1@51.475,100.625 51.465,100.635 P1.3@51.465,103.075 ; P1.3@51.114,102.724 cw(c50.268,101.878) 51.465,101.878 cw(c52.662,101.878) P1.3@51.816,102.724
TMS: IC1.21 P1.5 | length 13.6
  Top Layer w0.229: IC1.21@46.105,94.604 49.355,94.604 50.338,95.587
  Top Layer w0.508: 50.338,95.587 54.005,99.254 P1.5@54.005,103.075
TRST: IC1.2 P1.11 R48.1 | length 41.5
  Top Layer w0.229: v1(38.65,87.475) 39.375,87.475 39.605,87.705 IC1.2@39.605,89.104
  Top Layer w0.508: v1(59.513,94.038) 59.513,95.113 63.65,99.25 63.65,100.875 64.225,101.45 R48.1@64.225,103.075 P1.11@61.625,103.075 ; P1.11@61.976,102.724 cw(c62.822,101.878) 62.822,103.075 cw(c62.823,104.273) P1.11@61.976,103.426
  Bottom Layer w0.508: v1(38.65,87.475) 41.223,87.475 44.653,90.905 46.205,90.905 49.338,94.038 v1(59.513,94.038)
VBAT: C46.2 IC1.7 R51.1 V1.AK | length 45.6
  Top Layer w0.229: 42.105,85.68 IC1.7@42.105,89.104
  Top Layer w0.508: v1(40.905,83.63) 40.905,84.48 42.105,85.68
  Top Layer w0.635: V1.AK@36.4,83.593 39.543,83.593 C46.2@39.55,83.6 v1@40.775,83.6 ; v1(52.65,89.825) 54.3,88.175 67.025,88.175 67.75,88.9 R51.1@71.4,88.9
  Bottom Layer w0.635: v1(40.905,83.63) 40.905,85.63 45.1,89.825 v1(52.65,89.825)
VCC_SW: C17.1 C18.1 C19.2 D2.6 V5.K VZ2.K | length 35.2
  Top Layer w0.635: C19.2@2.175,60.05 2.175,61.275 1.425,62.025 1.425,65.625 2.2,66.4 4.701,66.4 5.3,65.801 D2.6@5.3,64.459 ; V5.K@5.6,39.543 VZ2.K@5.6,43.1 5.6,45.6 6.1,46.1 C18.1@6.95,46.1
  Top Layer w0.762: C19.2@2.175,60.05 2.175,55.175 5,52.35 C17.1@5,51.1 5,49.8 6.95,47.85 C18.1@6.95,46.1
VDD: C39.1 IC1.35 L4.2 N1.VCC P1.12 R10.1 R19.1 R25.2 R40.2 R41.2 R42.2 R43.2 R44.2 R46.2 R47.2 V7.K V10.K | length 221.1
  Top Layer w0.229: C39.1@37.25,101.6 37.25,100.475 37.575,100.15 38.525,100.15 39.605,99.07 IC1.35@39.605,97.617
  Top Layer w0.508: v1@15.25,93.864 16,94.614 ; v1(15.25,94.775) 15.411,94.614 16,94.614 ; V10.K@22.8,95.068 v1(21.143,95.068) 20.689,94.614 N1.VCC@19.175,94.614 16,94.614
  Top Layer w0.635: R19.1@9.375,83.075 v1(9.375,84.625) ; R10.1@14.675,83.075 v1(14.675,84.625) ; v1(23.825,89.2) R44.2@23.825,90.625 ; v1@48.375,100.625 R47.2@49.575,100.625 ; R46.2@54,92.425 55.825,92.425 ; 56.5,93.1 55.825,92.425 ; 57.225,92.425 57,92.425 55.825,92.425 ; V7.K@65.207,98.525 65.207,100.05 66.132,100.975 67.125,100.975 69.625,103.475 R25.2@70.95,103.475
  Top Layer w0.762: v1(14.675,84.625) 15.25,85.2 ; v1@15.25,93.864 v1(15.25,94.775) ; v1(36.125,103.05) 36.7,103.05 ; C39.1@37.2,101.6 37.2,102.55 ; 36.7,103.05 37.2,102.55 ; 36.7,103.05 v1(37.2,103.05) 37.2,102.55
  Top Layer w0.889: 15.25,85.2 v1@15.25,93.864 ; R42.2@17.352,99.092 v1(19.1,99.092) v1(20.175,99.092) 26.95,99.092 v1(28.875,99.092) v1(29.95,99.092) R40.2@31.75,99.092 ; L4.2@58.775,92.075 57.675,92.075 ; 57.675,92.075 57.16,92.59 57.16,94.96 60.988,98.788 ; 57.675,92.075 57.35,92.075 57,92.425 56.5,92.925 56.5,93.1 56.5,95.475 60.375,99.35 60.375,100.625 v1@61.45,100.625 ; 60.988,98.788 60.988,100.163 v1@61.45,100.625 ; 60.988,98.788 61.45,99.25 v1@61.45,100.625
  Bottom Layer w0.889: v1(21.143,95.068) 21.143,90.757 22.7,89.2 v1(23.825,89.2) ; 33.825,103.425 36.85,103.425 ; 36.916,104.059 33.841,104.059 ; v1@60.375,100.625 49.375,100.625 ; v1(60.375,100.65) v1(61.45,100.65) ; v1@61.45,100.625 63.05,100.625 ; P1.12@61.625,105.615 63.26,105.615 64.2,104.675 64.2,103.5 ; 65.062,101.362 67.513,101.362 ; 65.063,101.363 65.063,102.638 ; 33.841,104.059 v1(28.875,99.092) v1(29.95,99.092) 33.908,103.05 v1(36.125,103.05) v1@36.475,103.05 ; 33.841,104.059 34.608,104.825 38.25,104.825 ; v1@36.475,103.05 36.85,103.425 ; v1@36.475,103.05 v1(37.2,103.05) 37.2,103.775 ; 36.85,103.425 37.2,103.775 ; 37.2,103.775 38,104.575 ; 38,104.575 38.25,104.825 ; 38,104.575 44.075,104.575 48.025,100.625 v1@48.375,100.625 ; 38.25,104.825 44.175,104.825 47.825,101.175 ; 47.825,101.175 v1@48.375,100.625 ; 47.825,101.175 48.825,101.175 ; v1@48.375,100.625 49.375,100.625 ; 48.825,101.175 60.375,101.175 62.925,101.175 64.2,102.45 ; 48.825,101.175 49.375,100.625 ; 63.05,100.625 65.35,100.625 ; 63.05,100.625 63.563,101.138 ; 63.563,101.138 64.838,101.138 ; 63.563,101.138 64.2,101.775 ; 64.2,101.775 64.2,102.45 ; 64.2,101.775 64.838,101.138 ; 64.2,102.45 64.2,103.5 ; 64.2,103.5 65.063,102.638 ; 64.838,101.138 65.35,100.625 ; 65.063,102.638 65.5,102.2 v1(68.35,102.2) 67.513,101.362 ; 65.35,100.625 66.775,100.625 67.513,101.362
  Bottom Layer w1: v1(9.375,84.625) v1(14.675,84.625) ; v1(15.225,93.675) 15.25,93.7 v1(15.25,94.775) 15.25,97.85 16.492,99.092 v1@19.075,99.092 ; v1(19.1,99.092) v1(20.175,99.092)
  other v1: 48.375,100.725
VDD1: C38.1 IC1.32 | length 5
  Top Layer w0.229: IC1.32@41.105,97.617 41.105,99.38 42.025,100.3 42.55,100.3 42.85,100.6 C38.1@42.85,101.6
VDD2: C43.2 IC1.43 | length 7.9
  Top Layer w0.229: C43.2@32.35,94.025 32.35,94.975 33,95.625 34.825,95.625 35.55,94.9 35.55,94.275 36.721,93.104 IC1.43@37.605,93.104
VDDA: C12.2 C36.1 IC1.11 L5.1 U1.5 V1.K V2.K V3.K | length 122.5
  Top Layer w0.229: C36.1@43.5,85.7 C36.1@43.5,86.1 43.5,87.375 44.105,87.98 IC1.11@44.105,89.104
  Top Layer w0.305: U1.5@68.15,84 68.15,83.45 68.55,83.05 C12.2@70,83.05
  Top Layer w0.635: V2.K@29.666,81.307 29.666,80.434 30.317,79.783 37.333,79.783 ; V1.K@37.416,81.307 37.416,79.783 41.358,79.783 ; v1@44,84.225 v1(44,84.25) ; V3.K@49.441,83.232 49.441,82.041 48.725,81.325 ; 41.358,79.783 42.231,80.656 ; 41.358,79.783 47.183,79.783 48.725,81.325 ; 42.231,80.656 42.231,83.831 42.65,84.25 v1(42.9,84.25) v1(44,84.25) ; 42.231,80.656 42.9,81.325 45.334,81.325 ; v1(44,84.25) 45.325,84.25 45.879,83.696 45.879,81.871 ; 45.334,81.325 45.879,81.871 ; 45.334,81.325 46.425,81.325 ; 45.879,81.871 46.425,81.325 ; 46.425,81.325 48.725,81.325
  Top Layer w0.889: v1(42.9,84.25) 43.5,84.85 ; C36.1@43.5,85.7 43.5,84.85 ; v1(44,84.25) 43.5,84.75 43.5,84.85 ; C12.2@70,82.95 70,82.1 ; 70,82.1 70,82 v1(70.5,81.5) v1(69.4,81.5) 70,82.1
  Top Layer w1.016: L5.1@58.775,89.825 v1@57.35,89.825 ; v1@57.35,89.825 v1(57.05,89.525) v1(55.975,89.525) 56.275,89.825 v1@57.35,89.825
  Bottom Layer w0.889: 43.25,85.15 43.25,85.875 ; 54.125,88.275 55.013,89.163 55.613,89.163 ; v1(69.4,81.5) v1(70.5,81.5) 72.5,81.5 73.925,82.925 73.925,86.775 72.425,88.275 59.175,88.275 ; v1(42.9,84.25) v1(44,84.25) 44,85.35 ; v1(42.9,84.25) 42.9,85.525 43.25,85.875 ; v1(42.9,84.25) 44,85.35 ; 43.25,85.875 44,86.625 ; 44,85.35 44,86.625 ; 44,86.625 45.65,88.275 53.425,88.275 ; 53.425,88.275 54.75,89.6 57.85,89.6 59.175,88.275 ; 53.425,88.275 58.3,88.275 ; 55.613,89.163 v1(55.975,89.525) v1(57.05,89.525) 57.413,89.163 ; 55.613,89.163 57.413,89.163 ; 57.413,89.163 58.3,88.275 ; 58.3,88.275 59.175,88.275
VIN_PV: C47.2 IC1.5 R55.1 V2.AK | length 20.8
  Top Layer w0.229: 41.105,86.215 IC1.5@41.105,89.104
  Top Layer w0.508: R55.1@24.55,84.275 25.375,84.275 26.057,83.593 V2.AK@28.65,83.593 C47.2@31.943,83.593 ; C47.2@31.95,83.6 C47.2@31.943,83.593 ; 41.089,86.215 40.049,85.175 35.025,85.175 33.443,83.593 C47.2@31.943,83.593
pads on no net: D1.2 D2.2 HS1.Fix1 HS2.Fix1 IC1.4 IC1.6 IC1.8 IC1.10 IC1.13 IC1.14 IC1.15 IC1.16 IC1.17 IC1.18 IC1.24 IC1.30 IC1.31 IC1.40 IC1.41 IC1.42 IC1.47 V4.NC V5.NC V6.NC V7.NC V10.NC VZ1.NC VZ3.NC X3.0

## Polygon pours and split planes (outlines as drawn)
GND on Bottom Layer "DGND" (solid, remove dead copper, pour order 29): 29.635,108.74 15.74,108.74 1.35,94.35 1.35,73.975 3.175,72.15 36.3,72.15 37.675,73.525 37.675,76.35 36.25,77.775 24.914,77.775 21.325,74.186 20.414,74.186 19.3,75.3 19.025,75.575 19.025,83.8 22.1,86.875 22.4,86.875 36.161,86.875 38.15,88.864 40.764,88.864 42.275,90.375 41.55,91.1 33.15,91.1 30.7,91.1 27.85,93.95 26.85,92.95 25.504,92.95 23.75,94.704 23.75,99.275 30.475,106 30.475,107.9
GND on Bottom Layer "AGND" (solid, remove dead copper, pour order 26): 23.525,84.75 31.4,84.75 31.925,85.275 39.025,85.275 39.397,84.903 39.397,83.228 40.575,82.05 44.575,82.05 45.6,83.075 45.6,85.3 46.975,86.675 47,86.65 71.575,86.65 72.3,85.925 72.3,83.175 68.825,83.175 68.75,83.1 67.892,82.242 67.892,81.092 66.175,79.375 22.95,79.375 22.4,79.925 22.4,83.875
GND on Bottom Layer "15V_GND" (solid, remove dead copper, pour order 12): 110.5,94.65 92.2,94.65 91.225,93.675 91.225,86.7 95.475,82.45 110.35,82.45 112.064,84.164 112.064,93.086
PV_+ on Bottom Layer "PV+" (solid, remove dead copper, pour order 14): 11.2,56.05 5.85,56.05 1.975,52.175 1.975,25.175 4.35,22.8 29.95,22.8 32.825,25.675 32.825,28.975 32.825,40.625 28.4,45.05 28.4,45.1 28.35,45.1 25.275,48.175 14.125,48.175 14.025,48.175 11.19,51.01 11.19,55.925
GND on Bottom Layer "DGND_uC" (solid, remove dead copper, pour order 19): 39.1,102.986 37.775,101.661 34.46,101.661 30.502,97.703 28.203,97.703 27.743,97.243 27.743,94.657 28.5,93.9 39.5,93.9 41.136,95.536 41.1,100.15 41.625,100.675 43.25,100.675 43.325,100.675 44.425,99.575 44.6,99.4 47.025,99.4 47.025,99.6 43.7,102.925 43.575,103.05 39.1,103.05
GND on Bottom Layer "DGND_Source" (solid, remove dead copper, pour order 20): 66.1,107.625 103.55,107.625 104.95,106.225 105.25,105.925 105.25,103.375 105.925,102.7 112.525,96.1 105.425,96.1 88.575,96.1 88.25,96.1 86.375,97.975 86.225,98.125 86.225,99.325 85.05,100.5 72.475,100.5 72.475,100.425 71.325,99.275 71.25,99.2 68.1,99.2 68.1,99.65 69.725,101.275 70.15,101.7 70.15,103.025 69.225,103.95 67.1,103.95 65.55,105.5 65.55,106.55
GND on Bottom Layer "GND_Source" (solid, remove dead copper, pour order 21): 74.075,95.55 84.917,95.55 86.858,97.492 87.975,96.375 93.35,96.375 111.75,96.375 113.475,94.65 113.475,79.15 111.075,76.75 94.55,76.75 90.825,80.475 90.825,84.55 88.875,86.5 80.4,86.5 76.75,86.5 72.625,90.625 72.625,94.1
HOT_SPOT on Bottom Layer "Power Plane SW" (solid, remove dead copper, pour order 22): 13.693,51.268 14.468,50.493 ccw(c15.175,51.2) 15.175,50.2 26.136,50.2 40.343,35.993 ccw(c41.05,36.7) 41.05,35.7 61.686,35.7 68.393,28.993 ccw(c69.1,29.7) 69.1,28.7 73.3,28.7 ccw(c73.3,29.7) 74.007,28.993 75.707,30.693 ccw(c75,31.4) 76,31.4 76,57.175 ccw(c75,57.175) 75.707,57.882 74.032,59.557 ccw(c73.325,58.85) 73.325,59.85 61.03,59.85 ccw(c61.03,58.85) 60.323,59.557 50.466,49.7 44.614,49.7 42.8,51.514 42.8,54.693 43.217,55.11 45.69,55.11 ccw(c45.69,55.61) 46.19,55.61 46.19,56.71 ccw(c45.69,56.71) 45.69,57.21 43.304,57.21 39.307,61.207 ccw(c38.6,60.5) 38.6,61.5 20.625,61.5 ccw(c20.625,60.5) 19.918,61.207 18.068,59.357 ccw(c18.775,58.65) 17.775,58.65 17.775,55.264 16.981,54.47 15.209,54.47 ccw(c15,53.492) 15,54.492 14.4,54.492 ccw(c14.4,53.492) 13.4,53.492 13.4,51.975 ccw(c14.4,51.975)
-PV on Top Layer "PV-" (solid, remove dead copper, pour order 13): 68.1,75.275 58.9,75.275 57.175,73.55 57.175,60.3 50.525,53.65 50.475,53.6 45.55,53.6 45.55,51.1 44.1,49.65 27.225,49.65 23.4,45.825 23.4,40.8 21,38.4 21,20.55 23.475,18.075 23.475,5.425 25.55,3.35 30.757,3.35 32.6,5.491 32.6,12.1 40.22,19.72 40.22,31.27 45.175,36.225 45.575,35.825 59.1,35.825 67.55,44.275 67.55,61.05 68.025,61.525 68.025,75
GND on Top Layer "GND_POWER" (solid, remove dead copper, pour order 16): 81.625,79.775 89.925,79.775 91.375,81.875 101.45,81.875 104.45,81.875 106.375,78.425 106.05,76.275 104.335,74.56 100.525,74.56 98.7,72.9 93.175,72.9 93.175,72.825 91,70.65 91.075,70.575 91.075,63.525 93.425,61.175 93.425,30.925 93.425,21.5 91.075,19.15 91.075,15.7 90.225,15.2 77.7,15.2 59.7,15.2 56.05,11.55 56.05,6.5 53.875,4.325 50.025,4.325 49.75,4.325 46.4,7.675 46.4,15.7 53,22.3 69.225,22.3 78.1,31.175 78.1,59.375 73.575,63.9 73.575,74.56 73.915,74.9 76.8,74.9 81.475,79.575 81.475,79.775
GND on Top Layer "GND_uC" (solid, remove dead copper, pour order 15): 39.325,96.475 38.775,95.925 38.775,90.625 39.125,90.275 44.4,90.275 44.9,90.775 44.9,96.025 44.45,96.475

## Keep-outs
Keep-Out Layer:
  the board outline again, w0.127

## Other copper
Top Layer:
  region net -PV: 49.2,53.9 44.8,53.9 44.8,51.2 49.2,51.2
  region net HOT_SPOT: 19.2,53.8 14.8,53.8 14.8,51.1 19.2,51.1
  region net GND: 66.925,17.725 57.85,17.725 57.85,14.45 66.925,14.45
  region net GND: 70.163,21.388 64.038,15.263 69.875,9.425 76,15.55
  region net BAT_+: 45.1,33.15 45.1,25.4 53.075,25.4 53.075,33.15
  region net PV_+: 1.864,13 1.864,19.264 2.8,20.2 16.9,20.2 18,19.1 19.9,16.825 20.324,3.942 19.726,3.2 14.05,3.2 6.45,10.8 4.064,10.8
  region net PV_+: 3.55,32.175 17.3,32.175 18.275,31.2 18.275,25.025 16.325,23.075 3.425,23.075 1.9,24.6 1.9,30.25
  region net BAT_+: 57.975,33.275 60.3,33.275 64.125,29.45 64.125,25.125 58.25,25.125 57.775,25.6 57.775,31.9
  region net BAT_+: 105.6,99.025 109.3,99.025 110.625,97.7 110.25,97.325 105.25,97.325 104.85,97.725 105.125,98 105.125,98.8
  region net VDDA: 42.9,84.25 45.325,84.25 45.879,83.696 45.75,83.566 45.938,81.363 48.725,81.363 47.164,79.802 44.225,79.65 41.625,79.65 42.275,80.925 42.275,83.875 42.425,84.025
  region net OUTPUT: 58.425,4.539 ccw(c59.425,4.539) 58.718,3.831 61.006,1.543 ccw(c61.714,2.25) 61.714,1.25 82.45,1.25 ccw(c82.45,2.25) 83.157,1.543 85.407,3.793 ccw(c84.7,4.5) 85.7,4.5 85.7,10.2 ccw(c84.7,10.2) 85.407,10.907 84.607,11.707 ccw(c83.9,11) 83.9,12 75.025,12 ccw(c75.025,11) 74.318,11.707 71.061,8.45 68.064,8.45 64.507,12.007 ccw(c63.8,11.3) 63.8,12.3 60.1,12.3 ccw(c60.1,11.3) 59.1,11.289 58.718,10.907 ccw(c59.425,10.2) 58.425,10.2
  pour cut-out: 24.754,31.779 25.204,31.329 ccw(c25.275,31.4) 25.275,31.3 28.675,31.3 ccw(c28.675,31.4) 28.746,31.329 29.146,31.729 ccw(c29.075,31.8) 29.175,31.8 29.175,33.675 ccw(c29.075,33.675) 29.146,33.746 28.746,34.146 ccw(c28.675,34.075) 28.675,34.175 25.35,34.175 ccw(c25.35,34.075) 25.279,34.146 24.754,33.621 ccw(c24.825,33.55) 24.725,33.55 24.725,31.85 ccw(c24.825,31.85)
Bottom Layer:
  rectangle net GND: 44.375,92.45 46.5,94
  region net -PV: 49.496,54.166 44.5,54.166 44.5,51.2 49.496,51.2
  region net BAT_+: 53.125,33.7 46.075,33.7 44.6,30.575 44.6,25.175 35.8,16.375 35.8,6.1 36.475,5.425 36.55,5.5 43.025,5.5 43.025,10.225 46.9,14.1 49.9,14.1 54.2,18.4 54.2,28.325 54.2,32.625
  region net PV_+: 1.864,13 1.864,19.264 2.8,20.2 16.9,20.2 18,19.1 19.9,16.825 20.324,3.942 19.726,3.2 14.05,3.2 6.45,10.8 4.064,10.8
  region net OUTPUT: 63.65,11.3 68.025,6.925 71.3,6.925 75.65,11.275 83.725,11.275 84.475,10.525 84.475,4.875 81.489,1.889 62.075,1.889 59,4.964 59,10.575
  region net OUTPUT: 101.575,18.875 105.825,18.875 107.175,17.525 107.175,8.825 100.45,2.1 89.05,2.1 87.45,3.7 87.45,9.975 88.675,11.2 98.825,11.2 100.75,13.125 100.175,17.95
  region net 3V3: 72.95,98.5 70.575,96.125 66.2,96.125 63.35,93.275 63.5,93.125 65.5,93.125 67.325,94.95 71.175,94.95 73.275,97.05 73.4,96.925 84,96.925 84,97.225 84.45,97.675 84.45,98.5
  region net GND: 27.743,94.332 38.518,94.332 39.65,93.2 37.139,90.689 28.079,90.689 27.743,91.025
  region net GND: 44.384,94.166 44.85,93.7 44.85,92.85 42.689,90.689 37.239,90.689 37.239,91.839 40.475,95.075 41.622,95.075 42.531,94.166
  region net BAT_+: 55.6,25.25 ccw(c56.6,25.25) 55.893,24.543 56.325,24.111 56.325,18.075 ccw(c57.325,18.075) 56.618,17.368 59.593,14.393 ccw(c60.3,15.1) 60.3,14.1 90.05,14.1 ccw(c90.05,15.1) 90.757,14.393 92.214,15.85 96.925,15.85 ccw(c96.925,16.85) 97.632,16.143 98.232,16.743 ccw(c97.525,17.45) 98.525,17.45 98.525,55.036 99.239,55.75 101.861,55.75 102.5,55.111 102.5,32.85 ccw(c103.5,32.85) 102.793,32.143 106.293,28.643 ccw(c107,29.35) 107,28.35 111.4,28.35 ccw(c111.4,29.35) 112.4,29.35 112.4,66.775 ccw(c111.4,66.775) 112.107,67.482 109.527,70.062 ccw(c108.7,69.5) 109.263,70.327 107.882,71.707 ccw(c107.175,71) 107.175,72 102.025,72 ccw(c102.025,71) 101.318,71.707 99.561,69.95 90.064,69.95 87.582,72.432 ccw(c86.875,71.725) 86.875,72.725 81.725,72.725 ccw(c81.725,71.725) 81.018,72.432 77.793,69.207 ccw(c78.5,68.5) 77.5,68.5 77.5,30.314 74.286,27.1 68.289,27.1 61.257,34.132 ccw(c60.55,33.425) 60.55,34.425 58.25,34.425 ccw(c58.25,33.425) 57.543,34.132 56.768,33.357 ccw(c57.475,32.65) 56.475,32.65 56.475,28.539 55.893,27.957 ccw(c56.6,27.25) 55.6,27.25

## Silkscreen, mask and mechanical layers (free items; w line width, h text height)
Top Overlay:
  circle w0.254: c110.5,105.5 r3.5
  circle w0.254: c4.5,105.5 r3.5
  circle w0.254: c4.5,4.5 r3.5
  circle w0.254: c110.5,4.5 r3.5
  text "15V" at 79.75,107.9 h1.2
  text "FB" at 72.575,107.85 h1.2
  text "OUT" at 75.55,107.475 h1.2
  text "PV" at 20.9,103.175 h1.2 r90
  text "BAT" at 15.95,102.3 h1.2 r90
  text "OUT" at 25.475,102.225 h1.2 r90
  text "FAULT" at 30.05,101.6 h1.2 r90
  text "N.S." at 114.1,98.25 h1 r90
  text "Buck" at 96.875,8.725 h2
  text "Sinc" at 104.125,8.725 h2
  text "R0" at 101.625,5.325 h2
  text "25.05.2015" at 99.125,0.875 h1
  text "+PV" at 16.6,0.6 h1.5
  text "-PV" at 25.6,0.6 h1.5
  text "BAT+" at 36,0.6 h1.5
  text "BAT-" at 48.2,0.6 h1.5
  text "OUT" at 58.3,0.6 h1.5
  text "BAT-" at 67.6,0.6 h1.5
Comp Top:
  text "Material base FR4" at 125.6,20.725 h2.5
  text "Dupla Face/furos metalizados" at 125.6,16.2 h2.5
  text "Espessura de cobre 1Oz(35um) min." at 125.6,10.8 h2.5
  text "Acabamento HASL (Hot Air)" at 125.6,5.4 h2.5
  text "Espessura do laminado 1.6mm" at 125.6,-0.725 h2.5
Drill Drawing:
  circle w0.025: c138.381,77.919 r0.635
  lines w0.025: 137.746,62.044 137.746,63.314 139.016,63.314 139.016,62.044 137.746,62.044 ; 137.746,66.171 138.063,66.489 137.746,66.806 138.063,66.806 138.381,67.124 138.698,66.806 139.016,66.806 138.698,66.489 139.016,66.171 138.698,66.171 138.381,65.854 138.063,66.171 137.746,66.171 ; 137.746,70.299 138.381,70.934 139.016,70.299 138.381,69.664 137.746,70.299 ; 137.746,73.474 138.063,73.474 138.381,73.791 138.698,73.474 139.016,73.474 139.016,73.791 138.698,74.109 139.016,74.426 139.016,74.744 138.698,74.744 138.381,74.426 138.063,74.744 137.746,74.744 137.746,74.426 138.063,74.109 137.746,73.791 137.746,73.474 ; 137.746,81.094 138.063,81.729 137.746,82.364 138.381,82.046 139.016,82.364 138.698,81.729 139.016,81.094 138.381,81.411 137.746,81.094 ; 137.746,84.904 137.746,86.174 139.016,86.174 139.016,84.904 137.746,84.904 ; 137.746,89.031 137.746,89.666 138.063,89.666 138.063,89.984 138.698,89.984 138.698,89.666 139.016,89.666 139.016,89.031 138.698,89.031 138.698,88.714 138.063,88.714 138.063,89.031 137.746,89.031 ; 137.746,93.794 138.381,92.524 139.016,93.794 137.746,93.794 ; 138,85.158 138,85.92 138.762,85.92 138.762,85.158 138,85.158
  lines w0.381: 136.015,60.901 215.378,60.901 ; 136.015,95.191 215.378,95.191 ; 148.781,57.091 148.781,99.001 ; 163.59,57.091 163.59,99.001 ; 189.187,57.091 189.187,99.001 ; 199.269,57.091 199.269,99.001 ; 136.015,57.091 136.015,99.001 215.378,99.001 215.378,57.091 136.015,57.091
  text "Symbol" at 138.301,96.334 h1.83
  text "Hit Count" at 149.924,96.334 h1.83
  text "Finished Hole Size" at 164.733,96.334 h1.83
  text "Plated" at 190.33,96.334 h1.83
  text "Hole Type" at 200.412,96.334 h1.83
  text "3" at 149.924,92.524 h1.52
  text "1,000mm" at 164.733,92.524 h1.52
  text "PTH" at 190.33,92.524 h1.52
  text "Round" at 200.412,92.524 h1.52
  text "4" at 149.924,88.714 h1.52
  text "1,500mm" at 164.733,88.714 h1.52
  text "PTH" at 190.33,88.714 h1.52
  text "Round" at 200.412,88.714 h1.52
  text "4" at 149.924,84.904 h1.52
  text "3,300mm" at 164.733,84.904 h1.52
  text "NPTH" at 190.33,84.904 h1.52
  text "Round" at 200.412,84.904 h1.52
  text "6" at 149.924,81.094 h1.52
  text "1,300mm" at 164.733,81.094 h1.52
  text "PTH" at 190.33,81.094 h1.52
  text "Round" at 200.412,81.094 h1.52
  text "12" at 149.924,77.284 h1.52
  text "0,900mm" at 164.733,77.284 h1.52
  text "PTH" at 190.33,77.284 h1.52
  text "Round" at 200.412,77.284 h1.52
  text "12" at 149.924,73.474 h1.52
  text "1,800mm" at 164.733,73.474 h1.52
  text "PTH" at 190.33,73.474 h1.52
  text "Round" at 200.412,73.474 h1.52
  text "12" at 149.924,69.664 h1.52
  text "2,600mm" at 164.733,69.664 h1.52
  text "PTH" at 190.33,69.664 h1.52
  text "Round" at 200.412,69.664 h1.52
  text "17" at 149.924,65.854 h1.52
  text "1,100mm" at 164.733,65.854 h1.52
  text "PTH" at 190.33,65.854 h1.52
  text "Round" at 200.412,65.854 h1.52
  text "186" at 149.924,62.044 h1.52
  text "0,500mm" at 164.733,62.044 h1.52
  text "PTH" at 190.33,62.044 h1.52
  text "Round" at 200.412,62.044 h1.52
  text "256 Total" at 149.924,58.234 h1.52

## Dimensions
0,0 to 115,0 on Top Overlay
0,110 to 0,0 on Top Overlay

## Text inside footprints (layer, text, board x,y; h text height)
VZ2: Comp Mec "K" at 4.33,40.56 h0.95
X1: Top Overlay "1" at 18.9,4 h1.27; Top Overlay "3" at 37.5,4.3 h1.27; Top Overlay "2" at 28.1,4.5 h1.27
X2: Top Overlay "1" at 50.4,4.3 h1.27; Top Overlay "3" at 69.2,4.1 h1.27; Top Overlay "2" at 59.9,4.2 h1.27
XC1: Top Overlay "FAN" at 70.075,105.35 h1; Top Overlay "1" at 81.6,106.175 h0.95